# Altium PCB Power_24Vto160V.PcbDoc
Units mm, origin at the board's own origin, x right, y up, seen from the top; angles counter-clockwise.
Board outline 35 x 50 mm, 2 copper layers (L01 top, L02 bottom), stack 1.57 mm thick; 28 components, 14 nets, 71 pads, 33 vias.
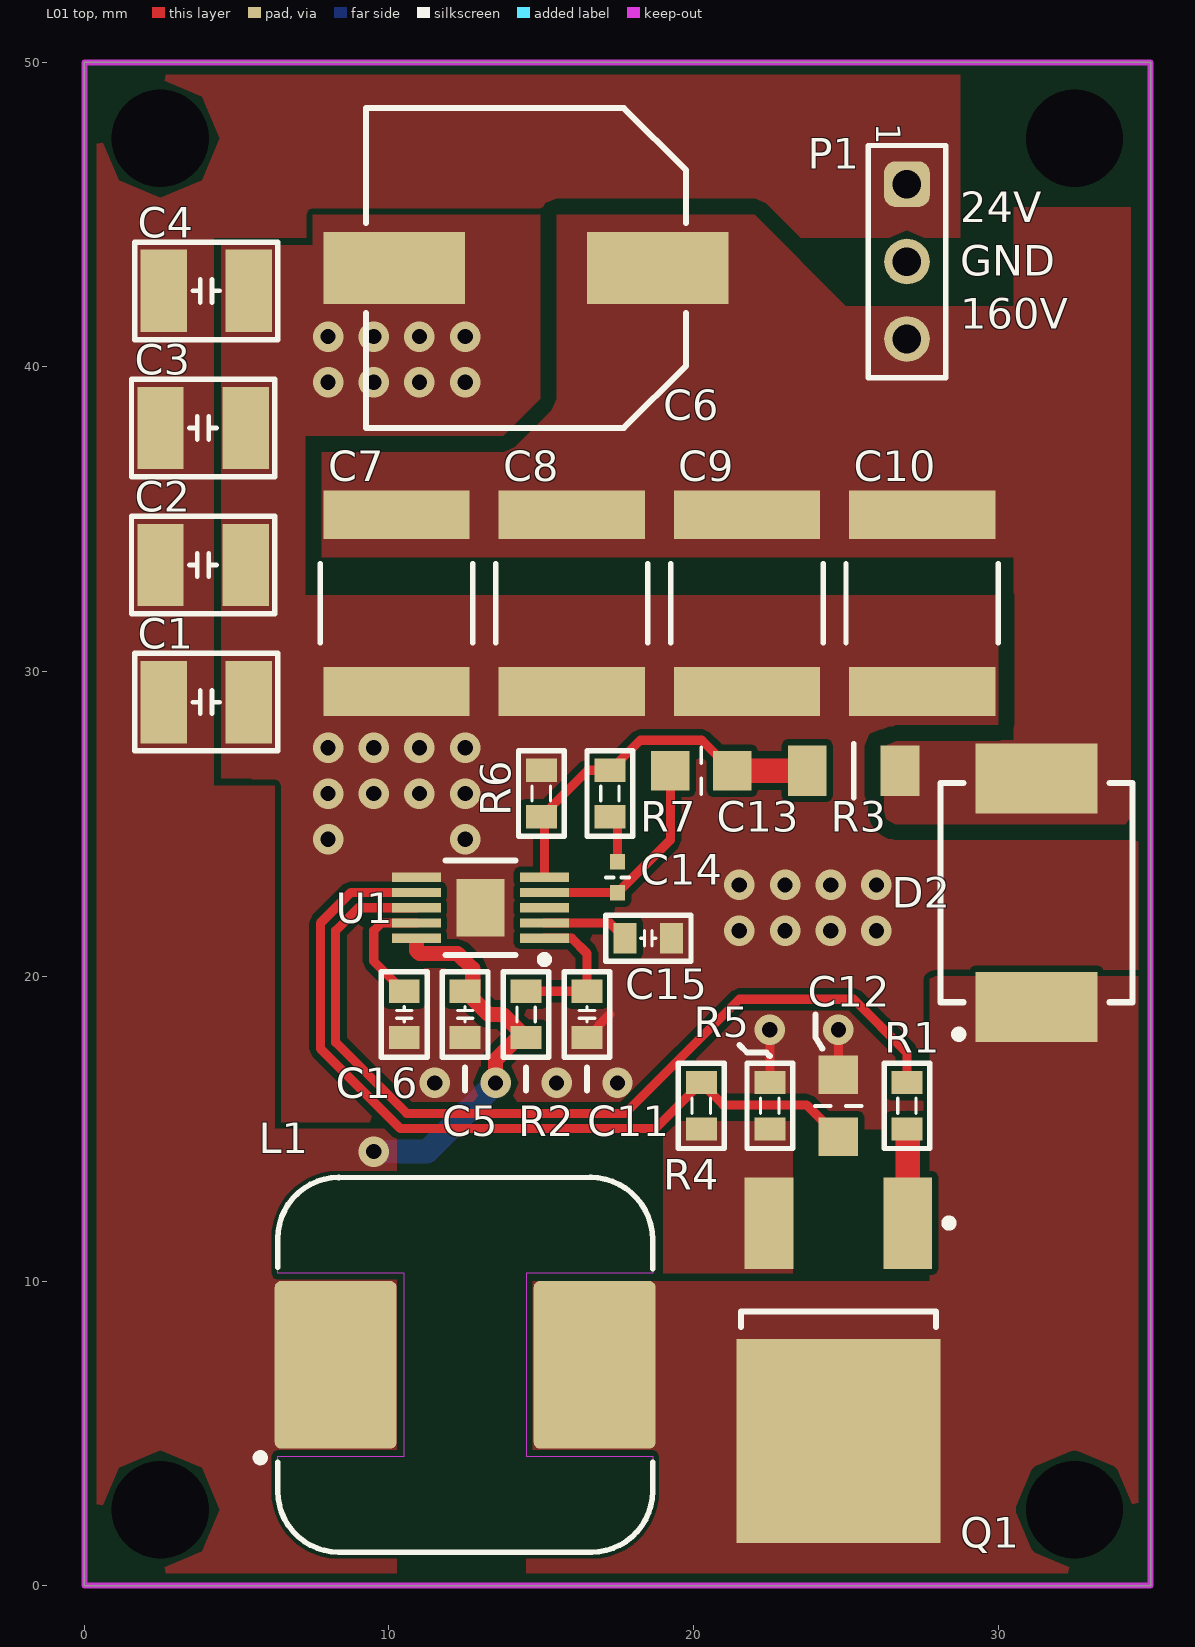
[diagram p0: L01 top view]
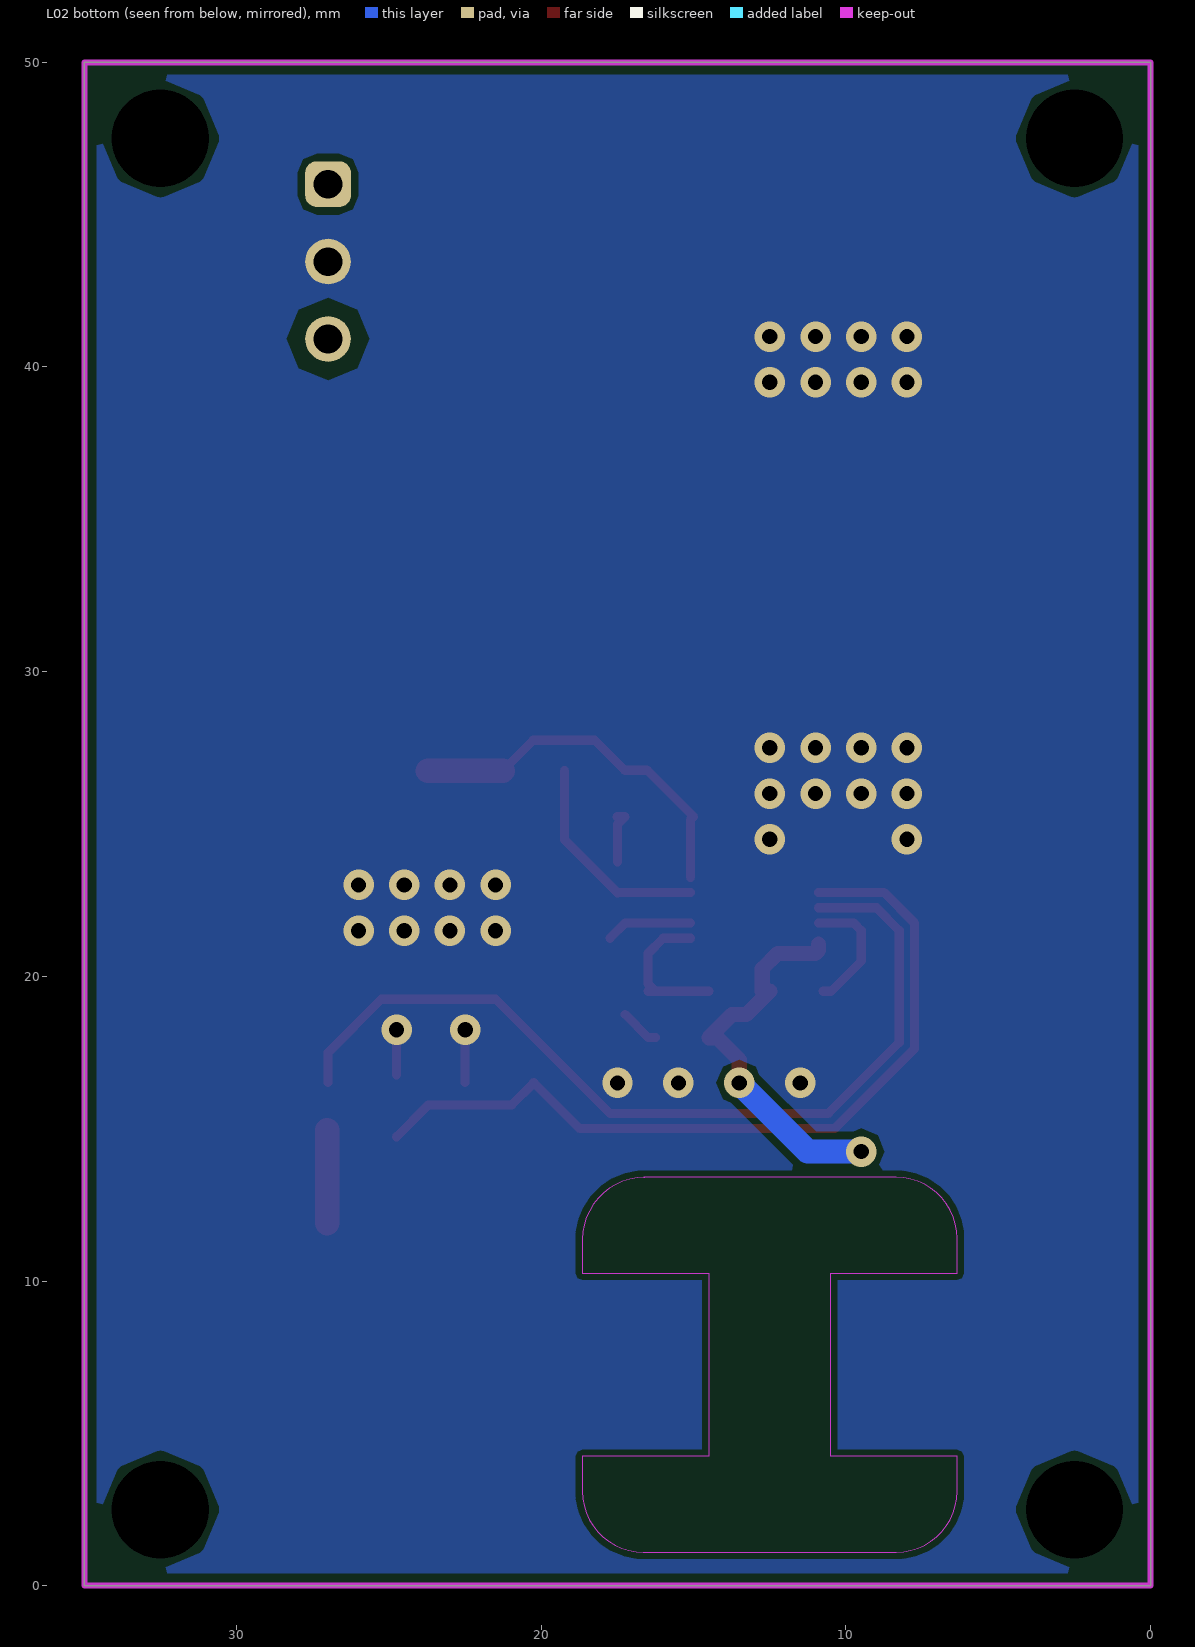
[diagram p1: L02 bottom view, seen from below]
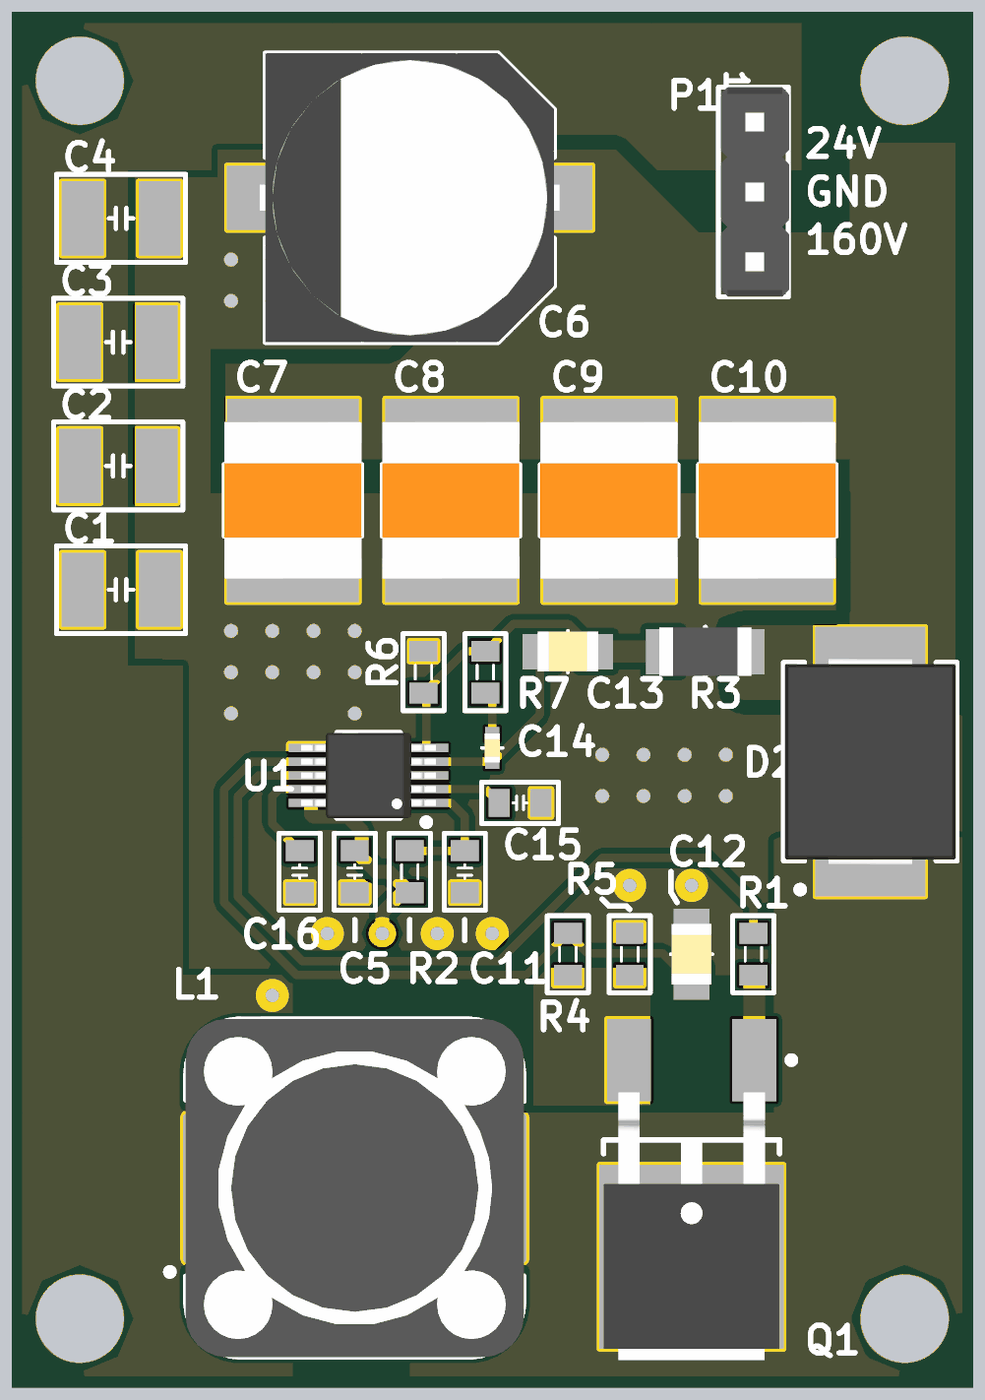
[diagram p2: 3D render of the assembled board from above, using the file's embedded part models]

## Layer stack, top to bottom
Top Solder: solder mask 0.0102, Solder Resist, Dk 3.5
L01 top: signal copper 0.035
Dielectric1: core 1.5, FR-4, Dk 4.8
L02 bottom: signal copper 0.035
Bottom Solder: solder mask 0.0102, Solder Resist, Dk 3.5

## Board outline
25.019,0 11.43,0 0,0 0,50 35,50 35,0

## Design rules (kind name [scope] priority, off if disabled: settings)
BoardOutlineClearance [All] p1: gap=0.4 ignorepadtopadclearanceinfootprint=FALSE except(0: Arc-SplitContinuation Track-SplitContinuation SMDPad-SplitContinuation THPad-SplitContinuation Via-SplitContinuation Fill-SplitContinuation Poly-SplitContinuation Region-SplitContinuation Text-SplitContinuation)
Clearance "Stitching GND" [IsStitchingVia and InNet('GND') vs (IsVia and (Not IsStitchingVia)) Or IsPad] p1: gap=0.2 ignorepadtopadclearanceinfootprint=FALSE
Clearance Clearance_160V [InNet('160V')] p2: gap=0.5 ignorepadtopadclearanceinfootprint=FALSE except(0: Arc-Hole Track-Hole SMDPad-Hole THPad-Hole Via-Hole Fill-Hole Poly-Hole Region-Hole Text-Hole)
Clearance Clearance-xPP-xTP-xTT [All] p3: gap=0.2 ignorepadtopadclearanceinfootprint=FALSE except(0: Arc-Hole Track-Hole SMDPad-Hole THPad-Hole Via-Hole Fill-Hole Poly-Hole Region-Hole Text-Hole)
ComponentClearance ComponentClearance_LEDs [HasFootprint('DFN135P350X210-4N') vs HasFootprint('IN-12')] p1: gap=0 collisioncheckmode=3 verticalgap=0 showdistances=FALSE
ComponentClearance [All] p2: gap=0.25 collisioncheckmode=3 verticalgap=0.25 showdistances=FALSE
DiffPairsRouting [All] p1: maxlimit=0.25 minlimit=0.25 mostfreqgap=0.25 toplayer_minwidth=0.381 toplayer_maxwidth=0.381 toplayer_prefwidth=0.381 bottomlayer_minwidth=0.381 bottomlayer_maxwidth=0.381 bottomlayer_prefwidth=0.381 maxuncoupledlength=12.5
Height [All] p1: minheight=0 maxheight=25 prefheight=12.5
HoleSize HoleSize-PTH [All] p1: absolutevalues=TRUE maxlimit=5 minlimit=0.25 maxpercent=80.000 minpercent=20.000
HoleToHoleClearance [All] p1: gap=0.15 allowstackedmicrovias=TRUE
MinimumAnnularRing "Minimum IAR  >0.45mm" [((ObjectKind = 'Pad') OR (ObjectKind = 'Via')) And (Layer = 'MultiLayer') And (HoleDiameter > AsMM(0.45))] p1: minimumring=0.25 // minimum inner annular ring for pads > 0.45mm finished hole size
MinimumAnnularRing "Minimum IAR <=0.45mm" [((ObjectKind = 'Pad') OR (ObjectKind = 'Via')) And (Layer = 'MultiLayer') And (HoleDiameter <= AsMM(0.45))] p2: minimumring=0.225 // minimum inner annular ring for pads <= 0.45mm finished hole size
MinimumSolderMaskSliver [All] p1: minsoldermaskwidth=0.1
PlaneClearance PlaneClearance-IPI [InNet('160V')] p1: clearance=0.6
PlaneClearance [All] p2: clearance=0.508
PlaneConnect [All] p1: planeconnectstyle=Relief reliefexpansion=0.4 reliefentries=4 reliefconductorwidth=0.5 reliefairgap=0.2
PolygonConnect PolygonConnect-xTW [All] p1: connectstyle=Direct reliefconductorwidth=0.5 reliefentries=4 polygonreliefangle="90 Angle" airgapwidth=0.254
RoutingCorners [All] p1: cornerstyle=45-Degree minsetback=2.5 maxsetback=2.5
RoutingVias "RoutingVias > 0.45mm" [(ObjectKind = 'Via') And (HoleDiameter > AsMM(0.45))] p1: holewidth=0.5 width=1 viastyle="Through Hole" minholewidth=0.45 minwidth=0.95 maxholewidth=0.9 maxwidth=1.4 // finishet hole size > 0.45mm
RoutingVias "RoutingVias <= 0.45mm" [(ObjectKind = 'Via') And (HoleDiameter <= AsMM(0.45))] p2: holewidth=0.3 width=0.8 viastyle="Through Hole" minholewidth=0.25 minwidth=0.7 maxholewidth=0.5 maxwidth=1 // finishet hole size <= 0.45mm
SilkToSilkClearance [All] p1: silktosilkclearance=0.2
SilkToSolderMaskClearance SilkscreenOverComponentPads [IsPad] p1: minsilkscreentomaskgap=0.2 clearancetoexposedcopper=TRUE
SolderMaskExpansion [All] p1: expansion=0.1
Width Width-xTW [All] p1: maxlimit=0.8 minlimit=0.15 preferedwidth=0.3 minimp=50.000000 maximp=50.000000 favimp=50.000000
19 further rules are at their usual default settings.

## Components (designator, comment, footprint, x,y, rotation, side; value= is the part's Value field where it differs from the comment)
C1 "4.7uF" 1210_C 4,29 r180 top
C2 "4.7uF" 1210_C 3.897,33.5 r180 top
C3 "4.7uF" 1210_C 3.897,38 r180 top
C4 "4.7uF" 1210_C 4,42.5 r180 top
C5 "330nF" 0603_C 12.5,18.75 r90 top
C6 "10uF" CAPAE109103X100M 14.5,43.25 r180 top
C7 "1uF" CAPC5750X27_EIA-2220 10.25,32.25 r90 top
C8 "1uF" CAPC5750X27_EIA-2220 16,32.25 r90 top
C9 "1uF" CAPC5750X27_EIA-2220 21.75,32.25 r90 top
C10 "1uF" CAPC5750X27_EIA-2220 27.5,32.25 r90 top
C11 "91pF" 0603_C 16.5,18.75 r90 top
C12 "220pF" CAPC2012X12_EIA-0805 24.75,15.75 r270 top
C13 "100nF" CAPC2012X12_EIA-0805 20.25,26.75 r180 top
C14 "820nF" CAPC1005X05_EIA-0402 17.5,23.25 r270 top
C15 "1.5uF" 0603_C 18.512,21.25 r180 top
C16 "100nF" 0603_C 10.5,18.75 r90 top
D2 "CD214C-F3600" DIOM6959X26N 31.25,22.75 r90 top
L1 "1.20mH" IND_COILCRAFT_MSS1260 12.5,7.25 r0 top
P1 "power" MOLEX_22-28-4030 27,46 r270 top
Q1 "STD16N65M5" DPAK228P972X240-3N 24.75,7.1 r270 top
R1 "3.4" 0603_R 27,15.75 r270 top
R2 "412k" 0603_R 14.5,18.75 r270 top
R3 "50k" RESC3216X06_EIA-1206 25.25,26.75 r0 top
R4 "1k" 0603_R 20.25,15.75 r270 top
R5 "0.15" 0603_R 22.5,15.75 r270 top
R6 "215" 0603_R 15,26 r270 top
R7 "8.06k" 0603_R 17.25,26 r270 top
U1 "TPS40210QDGQRQ1" TSSOP50P490X110_HS-11N 13,22.25 r180 top

## Footprints (in the part's own frame and the unit in brackets; to place one, negate y for a bottom-side part, rotate by r counter-clockwise, add the part's x,y. Pads: shape width x height; smd on the part's side, far side on the other; paste and mask are expansions set on the pad)
0603_C [mil]
  rect 30x40 smd: 1(-30,0) 2(30,0)
  silkscreen extent -55,-30 55,30, body extent -32,-17 32,17, height 26
0603_R [mil]
  rect 30x40 smd: 1(-30,0) 2(30,0)
  silkscreen extent -55,-30 55,30, body extent -32,-17 32,17, height 26
1210_C [mil]
  rect 60x106.3 smd: 1(-55,0) 2(55,0)
  silkscreen extent -93,-63 93,63, body extent -74,-51 74,51, height 42
CAPAE109103X100M [mm] "Aluminum Electrolytic Capacitor, Body 10.30x10.30x10.00mm, IPC Low Density"
  rect 4.65x2.35 smd: 1(-4.325,0) 2(4.325,0)
  silkscreen extent -5.25,-5.25 5.25,5.25, body extent -5.45,-5.25 5.45,5.25, height 10
CAPC1005X05_EIA-0402 [mil] "SMD chip EIA size 0402 for capacitors, Release: 2013-04-10_DH_Roc_AB_Roc"
  rect 20x20 smd: 1(-20,0) 2(20,0)
  silkscreen extent 0,-15 0,15, body extent -21,-11 21,11, height 22
CAPC2012X12_EIA-0805 [mil]
  rect 50x51 smd paste+0 mask+0: 1(-40,0) 2(40,0)
  silkscreen extent 0,-30 0,30, body extent -43,-29 43,29, height 57
CAPC5750X27_EIA-2220 [mm] "Chip Capacitor, 2-Leads, Body 5.7x5.0mm, height 2.5+0.2mm,Release: 2015-01-08_JMR_Roc"
  rect 1.6x4.8 smd: 1(-2.9,0) 2(2.9,0)
  silkscreen extent -1.3,-2.5 1.3,2.5, body extent -2.85,-2.5 2.85,2.5, height 2.5
DIOM6959X26N [mm] "Molded Diode, 2-Leads, Body 6.85x5.90mm, IPC Medium Density"
  rect 2.3x4 smd: 1(-3.75,0) 2(3.75,0)
  silkscreen extent -4.77,-3.15 3.6,3.15, body extent -3.77,-3.11 3.77,3.11, height 2.62
DPAK228P972X240-3N [mm] "D-PAK, 3-Pads, Body 6.10x6.56mm (max), IPC Medium Density"
  rect 3x1.6 smd: 1(-4.8,2.28) 3(-4.8,-2.28)
  rect 6.7x6.7 smd: 2(2.35,0)
  silkscreen extent -4.92,-3.2 -1.4,3.76, body extent -3.62,-3.2 6.1,3.2, height 2.4
IND_COILCRAFT_MSS1260 [mm] "2pin, SMD Shielded Power Inductor, 2-Leads, Body 12x12mm xH6mm (6.2mm max), Release: 2016-01-13_KR_HU"
  rrect10% 4x5.5 smd: 1(-4.25,0) 2(4.25,0)
  Keep-Out Layer region: -4.15,-6.15 -4.915,-5.998 -5.564,-5.564 -5.998,-4.915 -6.15,-4.15 -6.15,-4.15 -6.15,-3 -2,-3 -2,3 -6.15,3 -6.15,4.15 -5.998,4.915 -5.564,5.564 -4.915,5.998 -4.15,6.15 -4.15,6.15 4.139,6.15 4.113,6.15 4.893,5.995 5.553,5.553 5.995,4.893 6.15,4.113 6.15,4.113 6.15,4.1 6.15,3 2,3 2,-3 6.15,-3 6.15,-4.15 5.998,-4.915 5.564,-5.564 4.915,-5.998 4.15,-6.15 4.15,-6.15
  silkscreen extent -6.85,-6.16 6.15,6.15, body extent -6.15,-6.15 6.15,6.15, height 6.2
MOLEX_22-28-4030 [mm] "HDR, 1x3, Pitch 2.54mm, Release: JMR_07.11.2012"
  rrect50% 1.5x1.5 hole 0.94: 1(0,0)
  round 1.5 hole 0.94 paste-127: 2(2.54,0) 3(5.08,0)
  silkscreen extent -1.27,-1.27 6.35,1.27, body extent -1.27,-1.19 6.35,1.3, height 8.38
RESC3216X06_EIA-1206 [mil]
  rect 50x65 smd paste+0 mask+0: 1(-60,0) 2(60,0)
  silkscreen extent 0,-35 0,35, body extent -66,-34 66,34, height 28
TSSOP50P490X110_HS-11N [mm] "TSSOP, 10-Leads, Body 3.00x3.00mm, Pitch 0.50mm, Thermal Pad 1.88x1.57mm, IPC Medium Density"
  rect 1.6x0.3 smd: 1(-2.1,1) 2(-2.1,0.5) 3(-2.1,0) 4(-2.1,-0.5) 5(-2.1,-1) 6(2.1,-1) 7(2.1,-0.5) 8(2.1,0) 9(2.1,0.5) 10(2.1,1)
  rect 1.57x1.88 smd: 11(0,0)
  silkscreen extent -2.23,-1.55 1.15,1.82, body extent -2.45,-1.55 2.45,1.55, height 1.1

## Part data
C1 C2 C3 C4: "GRM32ER71H475KA88L", manufacturer=muRata, tolerance=±10%, voltage_rating=50V, capacitance_value=4.7uF, casing="SMD chip 1210", mounting_connection=SMT, order_number=GRM32ER71H475KA88L, series=Standard, technology_material=CERAMIC(X7R)
C5: "C1608X5R1H334K080AB", manufacturer=TDK, tolerance=±10%, voltage_rating=50V, capacitance_value=330nF, casing="SMD chip 0603", mounting_connection=SMT, order_number=C1608X5R1H334K080AB, series=Standard, technology_material=CERAMIC(X7R)
C6: "UUX2E100MNL1GS", manufacturer=Nichicon, temperature_range="-55°C to +105°C", tolerance=±20%, voltage_rating=250V, capacitance_value=10uF, casing="SMD case , Ø=10,Hight=10", mounting_connection=SMT, order_number=UUX2E100MNL1GS, series=FK, technology_material=ELEKTROLYT
C7 C8 C9 C10: "GRM55DR72E105KW01L", manufacturer=muRata, temperature_range="-55°C to +125°C", tolerance=±10%, voltage_rating=250V, ALTERNATIVE_PART=allowed, capacitance_value=1uF, casing="SMD chip 2220", mounting_connection=SMT, order_number=GRM55DR72E105KW01L, series=Standard, technology_material=CERAMIC(X7R)
C11: "GRM1885C1H910JA01D", manufacturer=muRata, temperature_range="-55°C to +125°C", tolerance=±10%, voltage_rating=50V, ALTERNATIVE_PART=allowed, capacitance_value=91pF, casing="SMD chip 0603", mounting_connection=SMT, order_number=GRM1885C1H910JA01D, series=Standard, technology_material=CERAMIC(X7R)
C12: "CC0805JRNPO9BN221", manufacturer=Yageo, tolerance=±10%, voltage_rating=50V, capacitance_value=220pF, casing="SMD chip 0805", mounting_connection=SMT, order_number=CC0805JRNPO9BN221, series=Standard, technology_material=CERAMIC(X7R)
C13: "CC0805KRX7R8BB104", manufacturer=Yageo, tolerance=±10%, voltage_rating=25V, capacitance_value=100nF, casing="SMD chip 0805", mounting_connection=SMT, order_number=CC0805KRX7R8BB104, series=Standard, technology_material=CERAMIC(X7R)
C14: "GRM155R61A824KE15D", manufacturer=muRata, tolerance=±10%, voltage_rating=10V, capacitance_value=820nF, casing="SMD chip 0402", mounting_connection=SMT, order_number=GRM155R61A824KE15D, series=Standard, technology_material=CERAMIC(X5R)
C15: "C1608X7R1A155K080AC", manufacturer=TDK, tolerance=±10%, voltage_rating=10V, capacitance_value=1.5uF, casing="SMD chip 0603", mounting_connection=SMT, order_number=C1608X7R1A155K080AC, series=Standard, technology_material=CERAMIC(X7R)
C16: "EMK107B7105KA-T", manufacturer="Taiyo Yuden", tolerance=±10%, voltage_rating=16V, capacitance_value=100nF, casing="SMD chip 0603", mounting_connection=SMT, order_number=EMK107B7105KA-T, series=Standard, technology_material=CERAMIC(X7R)
D2: "600V, 3amp", package=DO-214AB, voltage=1.12V, amp=3A, order=CD214C-F3600
L1: library part MSS1210-125KEB, "Inductor", ordernumber=MSS1210-125KEB, res=1.07Ohm
P1: library part 1007795, "Header single row 1x3pin", current_rating=4A, manufacturer=molex, voltage_rating=250V, #1_general_layout_instruction="link to datasheet based layout instruction (entry from Excel macro)", #2_custom_layout_instruction="IDF entry design specific layout instruction (if needed)", casing="Breakaway Header KK 2.54mm", CHECK_STATE=2014-07-24_DW_MJ, contact_material=TIN, custom_silkscreen_description=power, grid_pitch=2.54mm, mounting_connection=THT, order_number=22-28-4030, orientation=STRAIGHT/GERADE, PART_Description=CON-M/THT/42375/1x3P/2.54mm/S, PART_NUMBER=1007795, pin_configuration=1x3P, pluggable_pin_length=6.09mm, Published=2014-07-24_MJ, safety_standard=UL1977,UL94-0, series="42375 KK", UL_file=ECBT2.E29179,ECBT8.E29179, US_MATERIALNUMBER=1007795
Q1: "N-channel MOSFET 650V", #1_general_layout_instruction="link to datasheet based layout instruction (entry from Excel macro)", #2_custom_layout_instruction="entry design specific layout instruction (if needed)", availability_state=DPAK, order_number=STD16N65M5, PART_NUMBER=STD16N65M5
R1: "CRCW06033R40FKEA", manufacturer=Vishay, power_rating=0.1W, temperature_range="-55°C to +155°C", tolerance=1%, casing="SMD chip 0603", mounting_connection=SMT, order_number=CRCW06033R40FKEA, PART_NUMBER=1347890, resistor_value=3.4, TCR=100ppm, technology_material=METALFILM
R2: "ERJ-3EKF4123V", manufacturer="YAGEO (Phycomp)", power_rating=0.1W, temperature_range="-55°C to +155°C", tolerance=1%, casing="SMD chip 0603", mounting_connection=SMT, order_number=ERJ-3EKF4123V, PART_NUMBER=1347890, resistor_value=412k, TCR=100ppm, technology_material=METALFILM
R3: "PNM1206E5002BST1", manufacturer=Vishay, power_rating=400mW, temperature_range="-55°C to +155°C", tolerance=0.1%, casing="SMD chip 0603", mounting_connection=SMT, order_number=PNM1206E5002BST1, PART_NUMBER=1347890, resistor_value=50k, TCR=100ppm, technology_material=METALFILM
R4: "CRCW02011K00FKED", manufacturer=Vishay, power_rating=50mW, temperature_range="-55°C to +155°C", tolerance=1%, casing="SMD chip 0603", mounting_connection=SMT, order_number=CRCW02011K00FKED, PART_NUMBER=1347890, resistor_value=1k, TCR=100ppm, technology_material=METALFILM
R5: "ERJ-3RSFR15V", manufacturer=Panasonic, power_rating=50mW, temperature_range="-55°C to +155°C", tolerance=1%, casing="SMD chip 0603", mounting_connection=SMT, order_number=ERJ-3RSFR15V, resistor_value=0.15, TCR=100ppm, technology_material=METALFILM
R6: "ERJ-3EKF2150V", manufacturer=Panasonic, power_rating=100mW, temperature_range="-55°C to +155°C", tolerance=1%, casing="SMD chip 0603", mounting_connection=SMT, order_number=ERJ-3EKF2150V, resistor_value=215, TCR=100ppm, technology_material=METALFILM
R7: "CRCW06038K06FKEA", manufacturer=Vishay, power_rating=0.1W, temperature_range="-55°C to +155°C", tolerance=1%, casing="SMD chip 0603", mounting_connection=SMT, order_number=CRCW06038K06FKEA, PART_NUMBER=1347890, resistor_value=8.06k, TCR=100ppm, technology_material=METALFILM
U1: manufacturer=TI, #1_general_layout_instruction="link to datasheet based layout instruction (entry from Excel macro)", #2_custom_layout_instruction="entry design specific layout instruction (if needed)", custom_silkscreen_description="entry silkscreen text (if needed)", mounting_connection=SMT, order_number=TPS40210QDGQRQ1, Published=2014-07-15_MLa_xx

## Free pads (board coordinates)
  round 1.524 hole 3.2: 4(2.5,2.5) 4(2.5,47.5) 4(32.5,2.5) 4(32.5,47.5)

## Via types
v1: diameter 1, hole 0.5, L01 top to L02 bottom, tented both sides, 26 vias
v2: diameter 1, hole 0.5, L01 top to L02 bottom, 7 vias

## Nets (pads, with @x,y where several pads share a name; then routed paths per layer and width w, separated by ;. In a path a pad name is that pad's centre, name@x,y a point inside that pad or via, vN(x,y) a via of type N, cw(c..) or ccw(c..) an arc to the next point about the centre after c; other vN are vias at no path point)
24V: C1.2 C2.2 C3.2 C4.2 C5.2 L1.1 P1.1 R2.2 U1.10 | length 12.8
  L01 top w0.5: 10.9,21.05 10.9,20.85 11,20.75 12.25,20.75 12.75,20.25 12.75,19.512 C5.2@12.638,19.512 ; C5.2 13.262,18.75 13.738,18.75 R2.2 14.238,17.988 13.5,17.25 v2(13.5,16.5)
  L02 bottom w0.8: v2(9.5,14.25) 11.25,14.25 v2(13.5,16.5)
160V: C6.1 C7.2 C8.2 C9.2 C10.2 D2.2 P1.3 R3.2
GND: C1.1 C2.1 C3.1 C4.1 C5.1 C6.2 C7.1 C8.1 C9.1 C10.1 C11.1 C12.1 C15.1 C16.1 P1.2 R5.1 R6.1 U1.6 U1.11 | length 4.5
  L01 top w0.3: C11.1@16.25,17.988 16.488,17.988 17.25,18.75 ; R5.1 v2(22.5,18.25) ; C12.1 v2(24.75,18.25)
  other v1: 21.5,21.5 23,21.5 24.5,21.5 26,21.5 21.5,23 23,23 24.5,23 26,23 8,24.5 12.5,24.5 8,26 9.5,26 11,26 12.5,26 8,27.5 9.5,27.5 11,27.5 12.5,27.5 8,39.5 9.5,39.5 11,39.5 12.5,39.5 8,41 9.5,41 11,41 12.5,41
  other v2: 11.5,16.5 15.5,16.5 17.5,16.5
NetC11_2: C11.2 R2.1 U1.1 | length 4.9
  L01 top w0.3: R2.1 C11.2@16.25,19.512 ; U1.1 16,21.25 16.5,20.75 16.5,19.762 C11.2@16.25,19.512 ; C11.2 C11.2@16.25,19.512
NetC12_2: C12.2 R4.1 U1.7 | length 27.1
  L01 top w0.3: U1.7 8.75,22.75 7.75,21.75 7.75,17.626 10.376,15 18.738,15 R4.1 20.25,16.5 20.969,15.781 23.703,15.781 C12.2
NetC13_1: C13.1 R3.1 R6.2 R7.1 U1.5 | length 12.2
  L01 top w0.3: U1.5 15.1,25.138 R6.2 16.524,26.762 R7.1 17.262,26.762 18.25,27.75 20.266,27.75 C13.1
  L01 top w0.8: C13.1 R3.1
NetC13_2: C13.2 C14.2 U1.4 | length 7.1
  L01 top w0.3: U1.4 17.5,22.75 C14.2 19.234,24.476 C13.2
NetC14_1: C14.1 R7.2 | length 1.8
  L01 top w0.3: C14.1 17.5,24.988 R7.2 17.512,25.238 R7.2@17.512,25.234
NetC15_2: C15.2 U1.2 | length 2.9
  L01 top w0.3: U1.2 17.25,21.75 C15.2
NetC16_2: C16.2 U1.9 | length 4.2
  L01 top w0.3: C16.2@10.75,19.512 C16.2 10.488,19.512 9.5,20.5 9.5,21.5 9.75,21.75 U1.9
NetD2_1: D2.1 L1.2 Q1.2
NetQ1_1: Q1.1 R1.2 | length 3.1
  L01 top w0.6: R1.2 R1.2@27.03,14.958
  L01 top w0.8: Q1.1 R1.2@27.03,14.958
NetQ1_3: Q1.3 R4.2 R5.2
NetR1_1: R1.1 U1.8 | length 29.6
  L01 top w0.3: U1.8 9,22.25 8.25,21.5 8.25,17.833 10.583,15.5 17.75,15.5 21.5,19.25 25.25,19.25 27,17.5 R1.1
pads on no net: U1.3

## Polygon pours and split planes (outlines as drawn)
24V on L01 top "24V_L01" (solid, remove dead copper, pour order 2): 0,50 4.25,50 4.25,26.25 6.25,26.25 6.25,15 10,15 10.25,14.75 10.25,0 0,0
NetD2_1 on L01 top "netD2_L01" (solid, remove dead copper, pour order 6): 35,0 35,20 27.75,20 27.75,10 14.5,10 14.5,0
160V on L01 top "160_L01" (solid, remove dead copper, pour order 8): 35,33.75 35,42 25,42 22,45 15.5,45 15.5,39.25 13.75,37.5 7.5,37.5 7.5,33.75
24V on L01 top "24V_L01" (solid, remove dead copper, pour order 10): 28.75,44.25 28.75,50 0,50 0,44.25
GND on L01 top "GND_L01" (solid, remove dead copper, pour order 0): 14.959,45 14.959,38.959 13.75,37.75 7.25,37.75 7.25,32.5 30,32.5 30,28.25 7.5,28.25 7.5,26.5 4.5,26.5 4.5,44 7.5,44 7.5,45
160V on L01 top "160V_L01" (solid, remove dead copper, pour order 12): 26.25,25 35,25 35,45.25 30.5,45.25 30.5,27.75 26.25,27.75
NetQ1_3 on L01 top "NetQ1_L01" (solid, remove dead copper, pour order 14): 23.25,15.25 19.5,15.25 19,14.75 19,10.25 23.25,10.25
GND on L01 top "GND_L01" (solid, remove dead copper, pour order 16): 35,29 6.5,29 5.5,28 5.5,14.988 35,14.988
GND on L02 bottom "GND_L02" (solid, remove dead copper, pour order 18): 35,0 35,50 0,50 0,0

## Keep-outs
Keep-Out Layer:
  the board outline again, w0.2

## Silkscreen, mask and mechanical layers (free items; w line width, h text height)
Top Overlay:
  lines w0.2: 12.5,16.25 12.5,17 ; 14.5,16.25 14.5,17 ; 16.5,16.25 16.5,17 ; 21.5,17.75 21.75,17.5 22.381,17.5 22.5,17.381 ; 24,18.75 24,18 24.221,17.632
  text "24V" at 28.75,44.75 h1
  text "GND" at 28.75,43 h1
  text "160V" at 28.75,41.25 h1
1 / Board outline:
  the board outline again, w0.2

## Text inside footprints (layer, text, board x,y; h text height)
P1: Top Overlay "1" at 26,48 h0.8 r270